# Altium PCB pcbCambiennhietdotestboard.PcbDoc
Units mm, origin at the board's own origin, x right, y up, seen from the top; angles counter-clockwise.
Board outline 3.61 x 3.61 mm, 2 copper layers (Top Layer, Bottom Layer); 49 components, 49 nets, 178 pads, 33 vias.
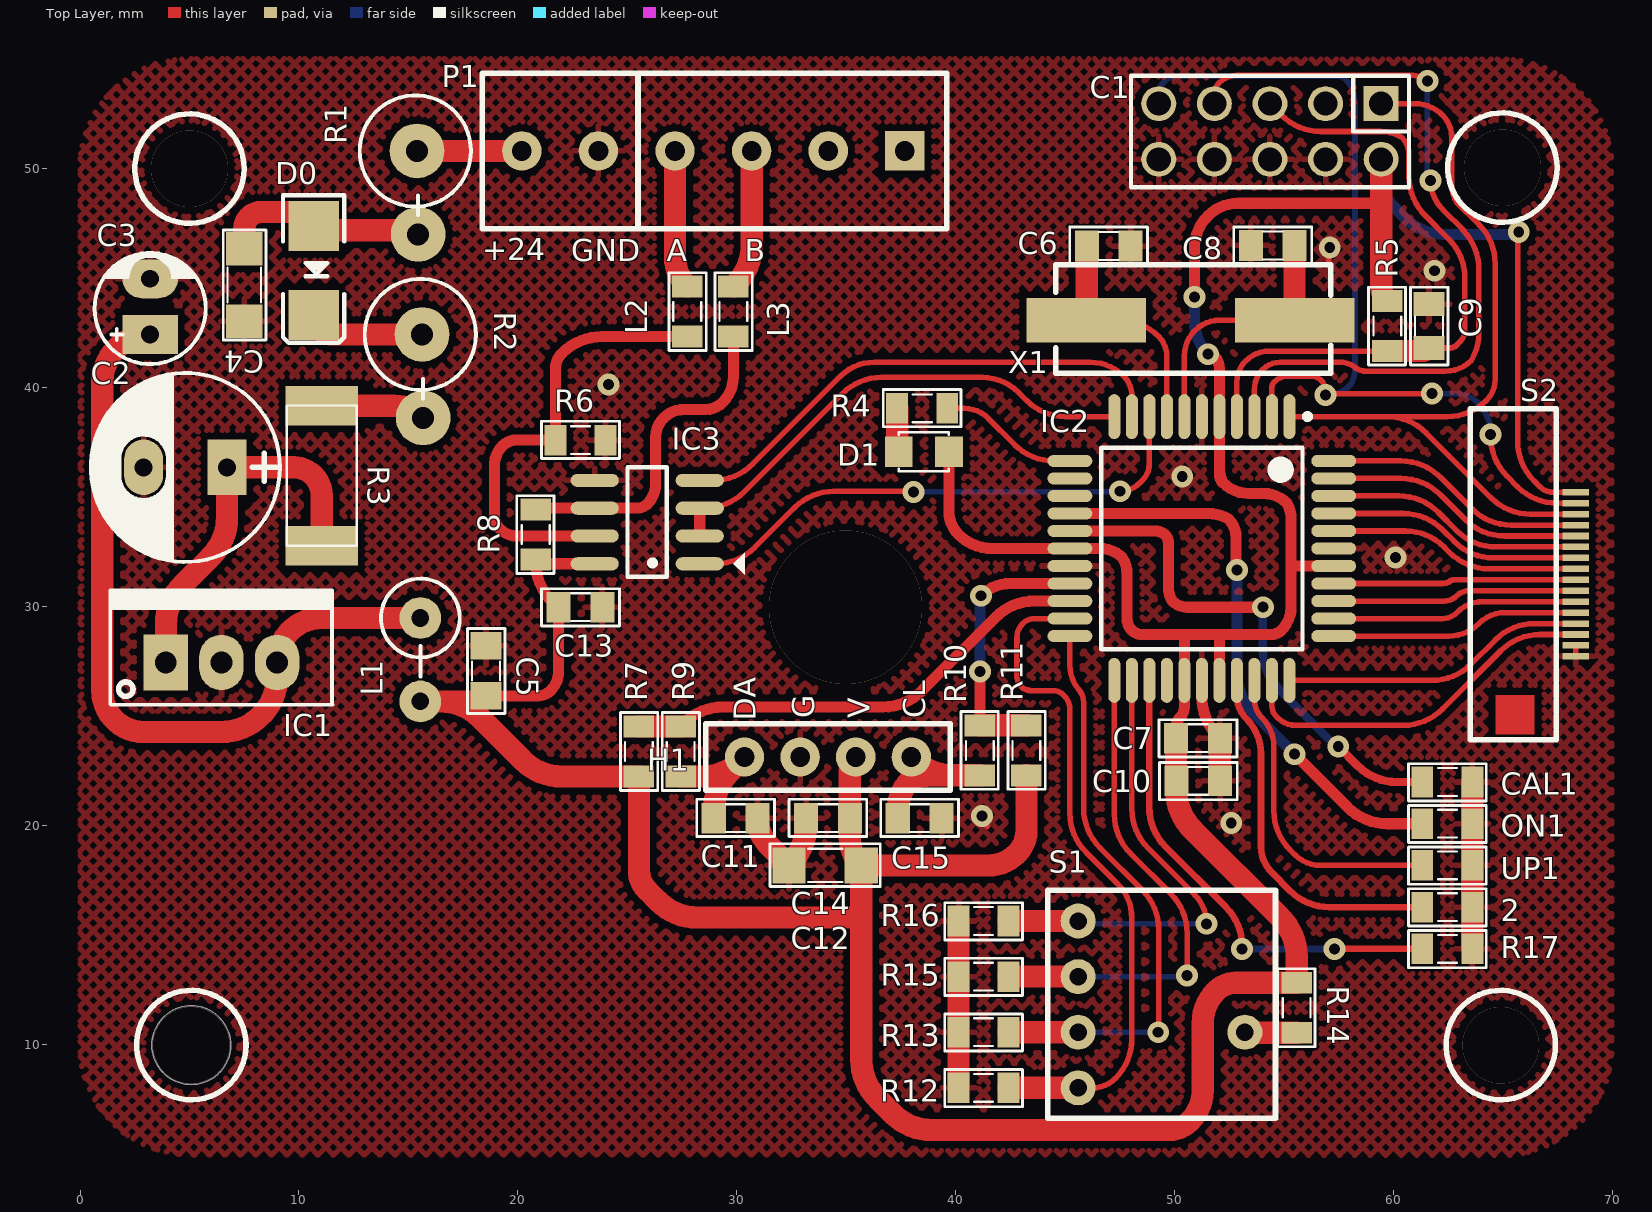
[diagram p0: Top Layer view]
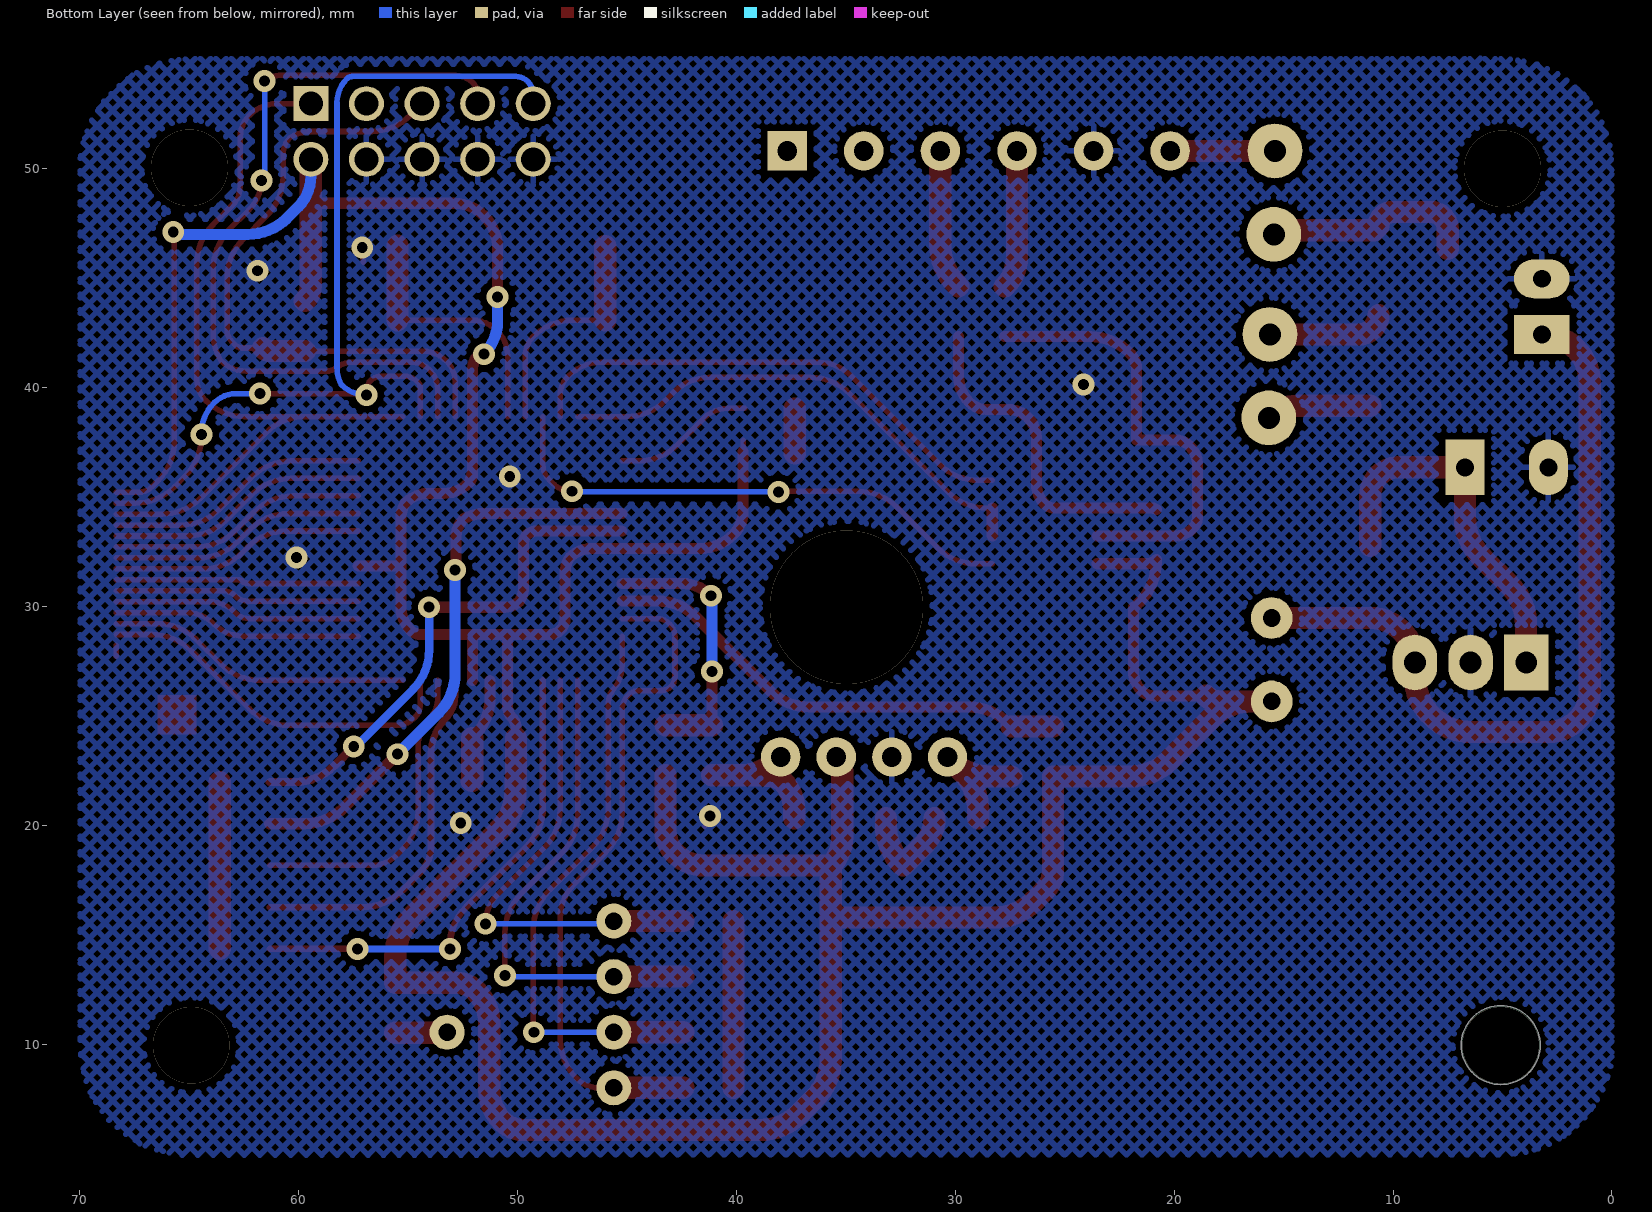
[diagram p1: Bottom Layer view, seen from below]

## Layer stack, top to bottom
Top Solder: solder mask 0.0102, Solder Resist, Dk 3.5
Top Layer: signal copper 0.0356
Dielectric 1: dielectric 0.32, FR-4, Dk 4.8
Bottom Layer: signal copper 0.0356
Bottom Solder: solder mask 0.0102, Solder Resist, Dk 3.5

## Board outline
3.277,9.953 ccw(c5.08,9.953) 5.08,8.15 ccw(c5.08,9.953) 6.883,9.953 ccw(c5.08,9.953) 5.08,11.756 ccw(c5.08,9.953)

## Design rules (kind name [scope] priority, off if disabled: settings)
Clearance [All] p1: gap=0.254 ignorepadtopadclearanceinfootprint=FALSE
PolygonConnect [All] p1: connectstyle=Relief reliefconductorwidth=0.254 reliefentries=4 polygonreliefangle="90 Angle" airgapwidth=0.254
RoutingVias [All] p1: holewidth=0.5 width=1 viastyle="Through Hole" minholewidth=0.5 minwidth=1 maxholewidth=0.5 maxwidth=1
SolderMaskExpansion [All] p1: expansion=0.102
Width [All] p1: maxlimit=1.016 minlimit=0.254 preferedwidth=0.508 minimp=50.000000 maximp=50.000000 favimp=50.000000
30 further rules are at their usual default settings.

## Components (designator, comment, footprint, x,y, rotation, side; value= is the part's Value field where it differs from the comment)
2 "0R" RES-SMD-0805 62.459,16.256 r0 top
C1 "JP5x2" JP5-D2T 54.356,51.689 r180 top
C2 "220uF/35V" CP1.5/3.4 6.713,36.346 r180 top value=100uF/35V/50V
C3 "100uF/16V" CP1/2 3.199,42.418 r90 top value=10uF/50V
C4 "10uF" SM-Cap-1206 7.5,46.33 r270 top
C5 "10uF" SM-CAP-0805 18.542,25.908 r90 top
C6 "33pF" CN-SMD-0805 46.99,46.457 r180 top
C7 "0.1uF" CN-SMD-0805 51.067,23.977 r0 top
C8 "33pF" CN-SMD-0805 54.483,46.482 r0 top
C9 "10uF" CN-SMD-0805 61.62,42.799 r90 top
C10 "10uF" CN-SMD-0805 51.083,22.022 r0 top
C11 "10uF" CN-SMD-0805 29.947,20.32 r180 top
C12 "10uF" SM-Cap-1206 32.385,18.161 r0 top value=103
C13 "10uF" CN-SMD-0805 22.86,29.957 r0 top
C14 "0.1uF" CN-SMD-0805 34.163,20.32 r180 top
C15 "10uF" CN-SMD-0805 38.354,20.32 r180 top
CAL1 "0R" RES-SMD-0805 62.459,21.971 r0 top
D0 "1N4007" DIO-SMD-106 10.668,45.339 r90 top value=1N5007 (schematic designator D0.0)
D1 "LED2" LED-0805-Red 37.401,37.059 r0 top
H1 "Header4P" PCBComponent_1 30.353,23.114 r0 top
IC1 "LM2940" QTO-220 3.919,27.432 r0 top
IC2 "ATMEL 16A" "TQFP 44" 51.244,32.639 r270 top value="Atmega 16L"
IC3 "MAX485" SO-8 25.908,33.846 r180 top
L1 "10uH" RES-1WD 15.545,27.813 r270 top
L2 "220nH" RES-SMD-0805 27.737,43.459 r90 top
L3 "220nH" RES-SMD-0805 29.845,43.459 r90 top
ON1 "0R" RES-SMD-0805 62.459,20.066 r0 top
P1 "CON6" 4plus2PKF350 22.438,47.498 r0 top
R1 "2R/1W" R2WD 15.443,45.72 r90 top value="R2W - 47"
R2 "160R/1W" R2WD 15.672,37.338 r90 top value="R2W - 47"
R3 "180R" RES-SMD-2512 11.168,35.965 r90 top
R4 "20k" RES-SMD-0805 38.47,39.04 r180 top
R5 "10k" RES-SMD-0805 59.715,42.799 r270 top
R6 "5k6" RES-SMD-0805 22.86,37.592 r180 top
R7 "24k" RES-SMD-0805 25.527,23.368 r90 top
R8 "5k6" RES-SMD-0805 20.816,33.274 r270 top
R9 "120R" RES-SMD-0805 27.432,23.368 r90 top
R10 "120R" RES-SMD-0805 41.107,23.419 r270 top
R11 "24k" RES-SMD-0805 43.231,23.419 r90 top
R12 "100k" RES-SMD-0805 41.275,8.001 r0 top
R13 "100k" RES-SMD-0805 41.275,10.541 r0 top
R14 "10k" RES-SMD-0805 55.575,11.659 r270 top
R15 "100k" RES-SMD-0805 41.275,13.081 r0 top
R16 "100k" RES-SMD-0805 41.275,15.621 r0 top
R17 "MD" RES-SMD-0805 62.459,14.351 r0 top
S1 "S-1010A" A-1010S 45.593,8.001 r0 top
S2 "SocketFPC" FPC16P-0.5 69.85,26.186 r90 top
UP1 "0R" RES-SMD-0805 62.459,18.161 r0 top
X1 "12Mhz" XTAL49S-SMD 55.483,43.067 r180 top value=4Mhz

## Footprints (in the part's own frame and the unit in brackets; to place one, negate y for a bottom-side part, rotate by r counter-clockwise, add the part's x,y. Pads: shape width x height; smd on the part's side, far side on the other; paste and mask are expansions set on the pad)
4plus2PKF350 [mm]
  rect 1.8x1.8 hole 0.9: 1(15.24,3.302)
  round 1.8 hole 0.9: 2(11.74,3.302) 3(8.24,3.302) 4(4.74,3.302) 5(1.24,3.302) 6(-2.26,3.302)
  silkscreen extent -4.06,-0.25 17.14,6.86, body extent -3.97,-0.17 17.03,6.73, height 8.81
A-1010S [mm]
  round 1.6 hole 0.8: 1(0,0) 2(0,2.54) 4(0,5.08) 8(0,7.62) C(7.62,2.54)
  silkscreen extent -1.4,-1.4 9.02,9.02, body extent -1.29,-1.27 8.91,8.93, height 6.81
CN-SMD-0805 [mm]
  rect 1.1x1.397 smd: 1(-1,0) 2(1,0)
  silkscreen extent -1.78,-0.86 1.78,0.84, body extent -1,-0.62 1,0.63, height 0.8
CP1.5/3.4 [mil] "Tu hoa 220->470uF,16V, 470uF/16V,25V"
  rect 70x100 hole 32: 1(0,0)
  oval 70x100 hole 32: 2(150,0)
  silkscreen extent -95,-170 245,170, body extent -85,-157 230,157, height 446
CP1/2 [mil] "Tu hoa < 22uF/16>50V"
  rect 70x100 hole 32: 1(0,0)
  oval 70x100 hole 32: 2(100,0)
  silkscreen extent -53,-100 146,100, body extent -49,-99 149,99, height 287
DIO-SMD-106 [mil]
  rect 90x90.55 smd: 1(80,0) 2(-80,0)
  silkscreen extent -130,-55 135,55, body extent -99,-50 106,52, height 95
FPC16P-0.5 [mm]
  rect 0.3x1.2 smd: 1(1.524,1.524) 2(2.024,1.524) 3(2.524,1.524) 4(3.024,1.524) 5(3.524,1.524) 6(4.024,1.524) 7(4.524,1.524) 8(5.024,1.524) 9(5.524,1.524) 10(6.024,1.524) 11(6.524,1.524) 12(7.024,1.524) 13(7.524,1.524) 14(8.024,1.524) 15(8.524,1.524) 16(9.024,1.524)
  silkscreen extent -2.29,2.41 12.83,6.35
JP5-D2T [mm] "10 pins, dual pin, straight, gold plating"
  rect 1.6x1.6 hole 1.1: 1(-5.08,-1.27)
  round 1.6 hole 1.1: 2(-2.54,-1.27) 3(0,-1.27) 4(2.54,-1.27) 5(5.08,-1.27) 6(5.08,1.27) 7(2.54,1.27) 8(0,1.27) 9(-2.54,1.27) 10(-5.08,1.27)
  silkscreen extent -6.35,-2.54 6.35,2.54, body extent -6.35,-2.54 6.35,2.54, height 8.55
LED-0805-Red [mil]
  rect 50x55 smd: 1(0,0) 2(90,0)
  silkscreen extent 0,-35 90,35, body extent 5,-25 85,25, height 43
PCBComponent_1 [mm]
  round 1.8 hole 0.9: 1(0,0) 2(2.54,0) 3(5.08,0) 4(7.62,0)
  silkscreen extent -1.78,-1.52 9.4,1.52
QTO-220 [mil] "TO-220 - 1-2-3"
  rect 80x100 hole 39: 1(0,0)
  oval 80x100 hole 39: 2(100,0) 3(200,0)
  silkscreen extent -100,-76 300,130, body extent -119,-64 322,121, height 755
R2WD [mm] "R2W, 2 pin, 700mil"
  round 2.5 hole 1: 1(1.27,0) 2(5.08,0.051)
  silkscreen extent 2.16,-2.41 7.62,2.67
RES-1WD [mm]
  round 1.905 hole 0.8: 1(-1.651,0) 2(2.159,0)
  silkscreen extent -3.45,-1.8 1.02,1.8, body extent -3.43,-1.7 2.67,1.7, height 12.65
RES-SMD-0805 [mil]
  rect 39.37x55 smd: 1(-45,0) 2(45,0)
  silkscreen extent -70,-34 70,33, body extent -39,-25 39,25, height 31
RES-SMD-2512 [mm] "Chip Capacitor, Body 3.2x2.5mm, IPC Medium Density"
  rect 1.8x3.3 smd: 1(-3.2,0.127) 2(3.2,0.127)
  silkscreen extent -3.2,-1.47 3.2,1.73, body extent -3.2,-1.47 3.2,1.73, height 0.6
SM-CAP-0805 [mil]
  rect 50x55 smd: 1(0,0) 2(90,0)
  silkscreen extent -32,-34 121,33, body extent 6,-25 84,25, height 31
SM-Cap-1206 [mil]
  rect 60x65 smd: 1(0,0) 2(130,0)
  silkscreen extent -34,-38 164,39, body extent 1,-31 127,32, height 40
SO-8 [mm] "8-Pin Small Outline Integrated Circuit 1.27 mm Pitch, IPC Medium Density"
  oval 2.2x0.6 smd: 1(-2.4,1.905) 2(-2.4,0.635) 3(-2.4,-0.635) 4(-2.4,-1.905) 5(2.4,-1.905) 6(2.4,-0.635) 7(2.4,0.635) 8(2.4,1.905)
  silkscreen extent -4.44,-2.5 0.9,2.5, body extent -2.89,-2.43 3.15,2.59, height 1.6
"TQFP 44" [mm] "TQFP, 44-Leads, Body 10,00x10,00mm, Pitch 0,80mm, IPC Medium Density"
  oval 2.05x0.55 smd: 1(-6.025,4) 2(-6.025,3.2) 3(-6.025,2.4) 4(-6.025,1.6) 5(-6.025,0.8) 6(-6.025,0) 7(-6.025,-0.8) 8(-6.025,-1.6) 9(-6.025,-2.4) 10(-6.025,-3.2) 11(-6.025,-4) 23(6.025,-4) 24(6.025,-3.2) 25(6.025,-2.4) 26(6.025,-1.6) 27(6.025,-0.8) 28(6.025,0) 29(6.025,0.8) 30(6.025,1.6) 31(6.025,2.4) 32(6.025,3.2) 33(6.025,4)
  oval 0.55x2.05 smd: 12(-4,-6.025) 13(-3.2,-6.025) 14(-2.4,-6.025) 15(-1.6,-6.025) 16(-0.8,-6.025) 17(0,-6.025) 18(0.8,-6.025) 19(1.6,-6.025) 20(2.4,-6.025) 21(3.2,-6.025) 22(4,-6.025) 34(4,6.025) 35(3.2,6.025) 36(2.4,6.025) 37(1.6,6.025) 38(0.8,6.025) 39(0,6.025) 40(-0.8,6.025) 41(-1.6,6.025) 42(-2.4,6.025) 43(-3.2,6.025) 44(-4,6.025)
  silkscreen extent -6.15,-4.6 4.6,4.95, body extent -6,-6 6,6, height 1.2
XTAL49S-SMD [mil]
  rect 215x80 smd: 1(0,0) 2(375,0)
  silkscreen extent -65,-100 430,95, body extent -61,-95 431,94, height 158

## Part data
2 CAL1 ON1 R3 R4 R5 R6 R7 R8 R9 R10 R11 R12 R13 R14 R15 R16 R17 UP1: library part Res-SMD, "Resistor", Manufacturer="Generic Components", Class=Passive, Published=08/06/2000, Publisher="Altium Hobart Technology Centre"
C1: "WR-PHD 2.54 mm Dual Socket Header", Manufacturer="Würth Elektronik eiSos GmbH", partNo=61301021821, ComponentLink1 Description=Manufacturer, ComponentLink1URL=http://www.we-online.com, ComponentLink2 Description=Datasheet, ComponentLink2URL=http://katalog.we-online.de/em/datasheet/6130xx21821.pdf, Created by="Karrer Zheng", Created Date="29 March 2013", NoPins=10
C2: library part CP3, "Cap 100uF/35V - 470uF/16V", Description 1="1000uF/6,3V - 470uF/16V - 330uF - 25V", Description 2="220uF/35V - 100uF/50V - 63V - 4,7uF/200V", Description 3="22uF => 33uF100V - 3,3uF => 4,7uF/250V", Description 4="2,2uF =>3,3uF/350 - 2,2uF/400V - 1uF/450V"
C3: library part CP1, "Cap P  0,1uF < 22uF , 16 - 50V", Description 1="10 => 220uF/6,3V/10V - 10uF => 100uF/16V", Description 2="0,1uF => 33uF/50V - 10uF => 22uF/63V", Description 3="0,47uF => 10uF/100V"
C4 C6 C7 C8 C9 C10 C11 C13 C14 C15: library part 1206C-10U-35V-X7R, "GENERIC CAPACITOR NON POLARISED 1206", Manufacturer="Taiyo Yuden", Manufacturer Part Number=GMK316F106ZL-T, Supplier Part Number 1=587-1352-2-ND, Reel=C90, Supplier 1=Digi-Key
C5: library part 0805C-10UF-25V-X5R-SAM, "CAPACITOR 0805 CERAMIC", Manufacturer 1=Samsung, Manufacturer Part Number 1=CL21A106KACLRNC, Reel=C19, Supplier Part Number 1=CL21A106KACLRNC, Supplierr 1=Samsung
C12: library part CM, "Cap SMD"
D0: library part "Diode SMD", "Default Diode", Code - JEDEC=DO-214-AB, Published=8-Jun-2000, Publisher="Altium Limited", Revision="July-2002: Re-released for DXP Platform."
D1: "Typical RED, GREEN, YELLOW, AMBER GaAs LED", LatestRevisionDate=17-Jul-2002, LatestRevisionNote="Re-released for DXP Platform.", PackageDescription="SM LED; 2 Flat Leads", PackageReference=3.2X1.6X1.1, PackageVersion=Feb-2002, Published=8-Jun-2000, Publisher="Altium Limited"
H1: library part HEADER4_PIN
IC1: library part TL-780
IC2: library part ATmega16A-AU, "8-bit AVR Microcontroller, 16KB Flash, 512 Bytes EEPROM, 1KB SRAM, 44-pin TQFP, Industrial Grade (-40癈 to 85癈)"
IC3: "RS232 - RS485 (Same sn75176)"
L1 L2 L3: library part L
P1: "Connector"
R1 R2: library part R2W, "Resistor 2W"
S1: "Switch", Manufacturer_Name="Copal Electronics", RS Part Number=3524666, Allied_Number=70041193, Allied Price/Stock=https://www.alliedelec.com/copal-s-1010a/70041193/, Datasheet Link=http://www.nidec-copal-electronics.com/e/catalog/switch/s-1000a&s-2000a.pdf, Manufacturer_Part_Number=S-1010A, RS Price/Stock=https://uk.rs-online.com/web/p/products/3524666
S2: library part FPC16P, "Socket FPC 16P 0.5mm"
X1: library part XT2, "Crystal, 32.768 KHz, -40 to 85 degC, 3.2 x 1.5 x 0.9 mm SMD"

## Via types
v1: diameter 1, hole 0.5, Top Layer to Bottom Layer, 28 vias
v2: diameter 3.5, hole 3.5, Top Layer to Bottom Layer, 4 vias
v3: diameter 7, hole 7, Top Layer to Bottom Layer, 1 vias

## Nets (pads, with @x,y where several pads share a name; then routed paths per layer and width w, separated by ;. In a path a pad name is that pad's centre, name@x,y a point inside that pad or via, vN(x,y) a via of type N, cw(c..) or ccw(c..) an arc to the next point about the centre after c; other vN are vias at no path point)
+24: P1.6 R1.2 | length 4.8
  Top Layer w1.016: R1.2 P1.6
GND: 2.2 C1.6 C1.7 C1.8 C1.9 C2.2 C3.2 C4.2 C5.2 C6.1 C7.2 C8.1 C9.2 C10.2 C11.1 C12.1 C13.2 C14.2 C15.1 CAL1.2 H1.2 IC1.2 IC2.6 IC2.18 IC2.28 IC2.39 IC3.5 ON1.2 P1.5 R6.1 R12.1 R13.1 R15.1 R16.1 R17.2 S2.1 S2.2 UP1.2 | length 27.4
  Top Layer w0.254: v1(24.146,40.134) v1@24.295,40.283 ; v1(41.205,20.424) 41.44,19.952 ; v1(52.589,20.095) v1@52.656,19.854 ; 57.049,45.712 v1(57.087,46.381) ; v1@60.003,32.151 v1(60.087,32.235) ; S2.1 S2.2
  Top Layer w0.508: IC2.28 51.244,25.852 ccw(c53.785,25.852) 51.988,24.056 C7.2
  Top Layer w1.016: C11.1 ccw(c32.685,20.32) 31.456,19.09 C12.1 32.419,18.195 ccw(c30.623,19.991) 33.163,19.991 C14.2 ; R12.1 R16.1 ; C7.2 52.067,22.06 ccw(c52.121,22.06) C10.2 ; R17.2 2.2 UP1.2 ON1.2 CAL1.2
  other v1: 50.35,35.933 61.867,45.328
NetC2_1: C2.1 IC1.1 R3.1 | length 17.2
  Top Layer w1.016: IC1.1 3.919,29.155 cw(c6.459,29.155) 4.663,30.952 5.969,32.258 ccw(c4.173,34.054) 6.713,34.054 C2.1 9.748,36.346 cw(c9.748,35.045) 10.661,35.971 ; 10.662,35.971 cw(c9.767,35.064) 11.041,35.064 R3.1
NetC3_1: C3.1 IC1.3 L1.1 | length 36.4
  Top Layer w1.016: C3.1 ccw(c3.199,40.235) 1.016,40.235 1.016,26.144 ccw(c2.903,26.144) 2.903,24.257 6.459,24.257 ccw(c6.459,26.797) 7.142,24.351 ccw(c6.459,26.797) 8.999,26.797 IC1.3 cw(c11.031,27.432) 9.017,27.705 cw(c11.031,27.432) 11.031,29.464 L1.1
NetC4_1: C4.1 D0.1 R1.1 | length 9.8
  Top Layer w1.016: C4.1 7.5,47.251 cw(c8.255,47.251) 8.255,48.006 10.033,48.006 cw(c10.033,47.371) D0.1 10.858,47.18 15.253,47.18 R1.1
NetC6_2: C6.2 IC2.8 X1.2 | length 10.7
  Top Layer w0.254: X1.2 45.984,43.067 47.473,43.067 cw(c47.473,40.527) 49.269,42.323 49.276,42.316 cw(c48.386,41.427) 49.644,41.427 IC2.8
  Top Layer w1.016: X1.2@45.984,43.067 ccw(c45.502,43.144) 45.99,43.144 C6.2
NetC8_2: C8.2 IC2.7 X1.1 | length 12.2
  Top Layer w0.254: IC2.7 50.444,41.431 cw(c52.092,41.431) 50.927,42.596 cw(c52.065,41.458) 52.065,43.067 X1.1
  Top Layer w1.016: X1.1 C8.2
NetD0_2: D0.2 R2.2 | length 5.5
  Top Layer w1.016: D0.2 ccw(c11.557,43.307) 11.557,42.418 R2.2
NetD1_1: D1.1 R4.2 | length 2.1
  Top Layer w1.016: D1.1@37.327,36.982 R4.2
NetIC2_12: IC2.12 R4.1 | length 6.4
  Top Layer w0.254: R4.1 40.392,39.04 cw(c40.392,37.491) 41.487,38.586 42.69,37.383 ccw(c44.486,39.179) 44.486,36.639 IC2.12
NetIC3_6: IC3.6 L3.1 R8.1 | length 15.3
  Top Layer w0.508: R8.1 cw(c20.969,34.264) 20.969,34.48 IC3.6 25.448,34.48 ccw(c25.448,35.131) 25.908,34.671 ccw(c24.988,35.591) 26.289,35.591 26.289,37.719 cw(c27.515,37.719) 26.648,38.586 26.67,38.608 cw(c27.59,37.688) 27.59,38.989 28.575,38.989 ccw(c28.575,40.088) 29.352,39.311 ccw(c28.161,40.501) 29.845,40.501 L3.1
NetIC3_7: IC3.7 L2.1 R6.2 | length 20.9
  Top Layer w0.508: 21.986,41.528 ccw(c22.638,40.878) 21.717,40.878 R6.2 19.917,37.592 ccw(c19.917,36.725) 19.304,37.338 ccw(c20.224,36.418) 18.923,36.418 18.923,34.141 ccw(c19.79,34.141) 19.177,33.528 ccw(c19.944,34.295) 19.944,33.21 IC3.7 ; 21.987,41.529 22.03,41.572 cw(c23.826,39.776) 23.826,42.316 L2.1
NetR2_1: R2.1 R3.2 | length 4.8
  Top Layer w1.016: R3.2 14.328,39.165 cw(c14.328,37.264) R2.1
NetR14_2: R14.2 S1.C | length 2.4
  Top Layer w1.016: S1.C ccw(c53.274,10.602) 53.274,10.516 R14.2
PIN_1: C1.1 IC2.1 S2.14 | length 36.3
  Top Layer w0.254: IC2.1 59.695,38.664 ; C1.1 60.973,52.959 cw(c60.973,51.163) 62.243,52.433 cw(c61.232,51.422) 62.662,51.422 62.662,49.2 ccw(c63.988,49.2) 62.89,48.456 63.899,47.447 cw(c62.103,45.651) 64.236,47.031 cw(c62.103,45.651) 64.643,45.651 64.643,40.359 cw(c63.298,40.359) 64.249,39.408 cw(c62.453,41.204) 62.453,38.664 59.695,38.664 ; S2.14 66.253,34.21 cw(c66.253,36.75) 64.457,34.954 61.491,37.92 ccw(c59.695,36.124) 59.695,38.664
PIN_2: C1.5 IC2.2 S2.15 | length 43.9
  Top Layer w0.254: IC2.2 54.444,39.982 cw(c54.836,39.982) 54.559,40.259 cw(c55.172,39.646) 55.172,40.513 56.185,40.513 cw(c56.185,39.746) 56.727,40.288 56.757,40.259 cw(c55.769,39.716) 56.896,39.716 v1(56.896,39.649) ccw(c56.96,39.713) v1@56.96,39.623 ; v1@56.96,39.476 57.197,39.713 v1(61.751,39.713) ; v1(64.44,37.846) 64.44,37.739 ccw(c66.98,37.739) 65.184,35.943 65.672,35.454 ccw(c67.469,37.25) 67.469,34.71 S2.15
  Bottom Layer w0.254: C1.5 49.276,53.362 cw(c50.143,53.362) 49.53,53.975 cw(c50.082,53.423) 50.082,54.204 57.54,54.204 cw(c57.54,53.857) 57.786,54.101 ; v1(56.896,39.649) 56.908,39.649 ccw(c56.908,41.252) 58.042,40.119 ccw(c56.581,40.91) 58.223,40.659 ccw(c56.581,40.91) 58.242,40.91 58.242,52.998 ccw(c56.681,52.998) 57.786,54.101 ; v1(61.751,39.713) 62.843,39.713 cw(c62.843,38.281) 63.856,39.294 cw(c62.445,37.883) 64.372,38.399 cw(c62.445,37.883) 64.44,37.883 v1(64.44,37.846)
PIN_3: C1.4 IC2.3 | length 36.8
  Top Layer w0.254: C1.4 51.816,53.372 cw(c52.596,53.372) 52.045,53.924 cw(c52.842,53.127) 52.842,54.254 60.891,54.254 cw(c60.891,53.474) 61.443,54.026 ccw(c61.504,54.087) 61.504,54 v1(61.544,54) ; IC2.3 53.645,39.892 cw(c54.965,39.892) 53.95,40.736 54.031,40.818 cw(c54.829,40.02) 54.829,41.148 57.564,41.148 cw(c57.564,40.02) 58.127,40.997 ; v1(61.697,49.454) ccw(c63.562,49.454) 62.243,48.135 63.238,47.139 ccw(c63.17,47.071) 63.17,47.168 cw(c61.409,45.407) 63.899,45.407 63.899,42.497 cw(c61.409,42.497) 63.551,41.228 cw(c62.364,42.415) 62.364,40.736 58.758,40.736 cw(c58.758,41.628) 58.337,40.842 ; 58.127,40.997 cw(c57.564,40.02) 58.337,40.842 ; 58.128,40.997 ccw(c58.758,41.628) 58.337,40.842
  Bottom Layer w0.254: v1(61.544,54) 61.544,49.822 ccw(c62.065,49.822) v1(61.697,49.454)
PIN_4: C1.3 C9.1 IC2.4 R5.2 | length 29.5
  Top Layer w0.254: IC2.4 52.844,40.248 cw(c54.189,40.248) 53.238,41.199 cw(c54.342,40.095) 54.342,41.656 R5.2 ; C1.3 54.882,52.433 ccw(c56.678,54.229) 56.678,51.689 59.418,51.689 cw(c59.418,49.868) 60.39,51.408 cw(c59.627,50.645) 60.706,50.645 60.706,49.642 ccw(c63.246,49.642) 61.026,48.409 ccw(c63.246,49.642) 61.45,47.846 62.52,46.776 cw(c60.724,44.98) 63.264,44.98 63.264,42.616 cw(c62.523,42.616) 63.047,42.092 62.89,41.935 cw(c62.561,42.264) 62.561,41.799 C9.1
  Top Layer w1.016: R5.2 61.275,41.656 ccw(c61.275,42.145) C9.1
PIN_5: C1.10 C5.1 C7.1 C10.1 C12.2 C13.1 C14.1 D1.2 H1.3 IC2.5 IC2.17 IC2.27 IC2.29 IC2.38 IC3.8 L1.2 R5.1 R7.1 R8.2 R11.1 R14.1 S2.16 | length 197.9
  Top Layer w0.254: D1.2 D1.2@39.688,37.592 ; v1(65.722,47.092) 65.557,47.092 65.507,47.041 cw(c65.106,46.64) 65.672,46.64 65.672,37.529 ccw(c68.212,37.529) 66.416,35.733 66.695,35.454 ccw(c67.284,36.043) 67.284,35.21 S2.16
  Top Layer w0.508: C5.1 20.925,25.908 ccw(c20.925,26.712) 21.494,26.144 ccw(c20.61,27.028) 21.86,27.028 C13.1 ; C13.1@21.775,29.992 21.56,30.208 cw(c23.356,32.004) 20.816,32.004 R8.2 ccw(c21.275,32.591) 21.275,31.941 IC3.8 ; D1.2 39.688,34.347 ccw(c41.205,34.347) 40.132,33.274 ccw(c41.665,34.807) 41.665,32.639 IC2.17 46.591,32.639 cw(c46.591,31.174) 47.627,32.21 cw(c46.353,31.466) 47.828,31.466 47.828,29.427 ccw(c48.566,29.427) 48.041,28.908 ccw(c48.403,29.265) 48.046,28.903 ccw(c48.516,29.376) 48.516,28.71 50.444,28.71 ; C7.1 50.067,24.461 cw(c50.749,24.461) 50.267,24.943 ccw(c49.837,25.372) 50.444,25.372 IC2.27 50.444,28.71 ; v1(50.902,44.12) 50.902,46.326 cw(c53.051,46.326) 51.531,47.846 cw(c52.889,46.489) 52.889,48.409 59.436,48.409 ; v1(51.531,41.515) 51.613,41.515 cw(c51.613,41.228) 51.816,41.431 cw(c51.264,40.879) 52.044,40.879 IC2.5 52.044,36.34 ; IC2.29 52.044,28.618 cw(c52.175,28.618) 52.083,28.71 ; IC2.38 55.321,31.839 ; 50.444,28.71 52.083,28.71 ; 52.044,36.34 ccw(c53.578,36.34) 52.215,35.636 ; 52.044,36.34 52.044,36.049 ccw(c52.628,36.049) 52.215,35.636 ; 52.083,28.71 54.411,28.71 ccw(c54.411,29.376) 54.882,28.905 ccw(c53.822,29.965) 55.321,29.965 55.321,31.839 ; 52.215,35.636 ccw(c53.377,36.797) 53.377,35.155 54.056,35.155 cw(c54.056,33.635) 55.131,34.71 cw(c53.822,33.979) 55.321,33.979 55.321,31.839
  Top Layer w1.016: L1.2 L1.2@16.474,25.654 ; C5.1 cw(c17.929,26.521) 17.929,25.654 L1.2@16.474,25.654 ; R11.1 43.231,19.747 cw(c41.757,19.747) 42.799,18.705 cw(c41.487,20.017) 41.487,18.161 C12.2 ; C7.1 50.067,22.06 ccw(c50.121,22.06) C10.1 50.083,21.581 ccw(c52.623,21.581) 50.827,19.785 54.831,15.781 cw(c53.035,13.985) 55.575,13.985 R14.1 52.808,12.802 ccw(c52.808,11.501) 51.888,12.421 ccw(c53.351,10.958) 51.283,10.973 ccw(c53.351,10.958) 51.283,10.958 51.283,7.887 cw(c49.288,7.887) 50.698,6.477 cw(c49.717,7.458) 49.717,6.071 38.913,6.071 cw(c38.913,8.586) 37.135,6.807 36.431,7.511 cw(c38.227,9.307) 35.687,9.307 35.687,15.781 ; C1.10 59.436,48.409 59.436,44.617 ccw(c60.39,44.617) R5.1 ; L1.2@16.474,25.654 cw(c16.474,23.114) 18.27,24.91 20.211,22.969 ccw(c22.007,24.765) 22.007,22.225 R7.1 25.527,17.945 ccw(c26.828,17.945) 25.908,17.026 26.409,16.525 ccw(c28.205,18.321) 28.205,15.781 35.687,15.781 ; H1.3@35.163,22.462 cw(c36.085,22.462) H1.3 ccw(c36.085,22.462) H1.3@35.163,22.462 ; H1.3@35.163,22.462 C14.1 35.163,19.426 ccw(c36.952,19.426) C12.2 ; 35.687,15.781 C12.2
  Bottom Layer w0.508: v1(50.902,44.12) 50.902,43.035 ccw(c53.051,43.035) v1(51.531,41.515) ; C1.10 59.436,49.645 ccw(c61.431,49.645) 60.02,48.235 60.521,47.734 ccw(c62.317,49.53) 62.317,46.99 65.384,46.99 ccw(c65.384,47.163) 65.507,47.041 65.557,47.092 v1(65.722,47.092)
PIN_9: IC2.9 IC3.1 | length 24.5
  Top Layer w0.254: IC3.1 29.022,31.941 ccw(c29.022,34.48) 30.818,32.684 32.642,34.509 cw(c34.438,32.713) 34.438,35.253 37.998,35.253 cw(c37.998,35.155) v1(38.067,35.224) ; v1(47.498,35.255) ccw(c47.498,36.556) 48.418,35.636 48.532,35.75 ccw(c47.778,36.505) 48.844,36.505 IC2.9
  Bottom Layer w0.254: v1(38.067,35.224) 47.221,35.224 ccw(c47.221,35.329) 47.295,35.255 v1(47.498,35.255)
PIN_10: IC2.10 IC3.4 | length 23.5
  Top Layer w0.254: IC3.4 28.927,35.75 ccw(c28.927,38.291) 30.723,36.494 34.742,40.513 cw(c36.275,38.98) 34.743,40.514 cw(c36.275,38.98) 36.275,41.148 46.143,41.148 cw(c46.143,38.98) 47.676,40.513 cw(c46.786,39.623) 48.044,39.623 IC2.10
PIN_11: IC2.11 IC3.2 IC3.3 | length 23
  Top Layer w0.254: IC3.3 28.536,34.48 ccw(c28.536,37.02) 30.332,35.224 34.823,39.716 cw(c36.619,37.92) 36.619,40.46 41.205,40.46 cw(c41.205,38.108) 42.867,39.772 cw(c41.205,38.108) 42.868,39.771 43.231,39.408 ccw(c45.027,41.204) 45.027,38.664 IC2.11
  Top Layer w0.508: IC3.2 IC3.3
PIN_15: IC2.15 ON1.1 | length 26.3
  Top Layer w0.381: v1@52.844,31.601 v1(52.844,31.654) ; v1@55.483,23.191 v1(55.483,23.242)
  Top Layer w0.508: IC2.15 51.531,34.239 cw(c51.531,32.433) 52.465,33.979 cw(c51.636,33.15) 52.808,33.15 52.808,31.742 ccw(c52.932,31.742) v1(52.844,31.654) ; v1(55.483,23.242) 57.915,20.81 ; 57.915,20.81 ccw(c59.711,22.606) 59.711,20.066 ON1.1
  Bottom Layer w0.508: v1(52.844,31.654) 52.844,26.933 ccw(c55.384,26.933) 53.588,25.137 v1(55.483,23.242)
PIN_16: CAL1.1 IC2.16 | length 23.8
  Top Layer w0.381: v1(57.476,23.596) 57.48,23.596 58.362,22.715 ccw(c60.158,24.511) 60.158,21.971 CAL1.1
  Top Layer w0.508: IC2.16 49.092,33.439 cw(c49.092,32.657) 49.425,33.364 cw(c49.209,32.904) 49.717,32.903 49.717,30.87 ccw(c50.911,30.87) 49.898,30.239 ccw(c50.579,30.92) 50.579,29.957 v1(54.031,29.957)
  Bottom Layer w0.381: v1(54.031,29.957) 54.031,27.996 ccw(c56.571,27.996) 54.775,26.2 57.31,23.665 ccw(c57.476,23.832) v1(57.476,23.596)
PIN_19: IC2.19 R10.1 R11.2 | length 12.4
  Top Layer w0.508: R10.1 v1(41.107,27.028) ; v1(41.148,30.48) cw(c42.498,29.13) 42.498,31.039 IC2.19
  Top Layer w1.016: R10.1 R11.2
  Bottom Layer w0.508: v1(41.107,27.028) 41.107,30.272 ccw(c40.813,30.272) 41.021,30.48 v1(41.148,30.48)
PIN_20: IC2.20 R7.2 R9.2 | length 21.7
  Top Layer w0.508: R9.2 27.577,24.656 cw(c29.373,22.86) 29.373,25.4 36.674,25.4 ccw(c36.674,27.94) 38.47,26.144 41.821,29.495 cw(c43.617,27.699) 43.617,30.239 IC2.20
  Top Layer w1.016: R7.2 R9.2
PIN_21: IC2.21 R12.2 S1.1 | length 31
  Top Layer w0.254: IC2.21 43.617,29.439 ccw(c43.617,28.654) 43.062,29.209 ccw(c43.697,28.574) 42.799,28.574 42.799,26.776 ccw(c43.398,26.776) 42.975,26.352 43.062,26.264 ccw(c43.509,27.034) 43.509,26.144 44.45,26.144 cw(c44.45,25.486) 44.915,25.951 44.958,25.908 cw(c44.345,25.295) 45.212,25.295 45.212,20.559 ccw(c47.752,20.559) 45.956,18.763 47.396,17.323 cw(c45.832,15.758) 48.044,15.758 48.044,10.235 cw(c45.504,10.235) 47.301,8.439 47.295,8.433 cw(c46.252,9.475) 46.252,8.001 S1.1
  Top Layer w1.016: R12.2 S1.1
PIN_22: IC2.22 R13.2 S1.2 | length 26.4
  Top Layer w0.254: IC2.22 45.22,27.305 ccw(c46.973,27.305) 45.593,26.223 ; v1(49.251,10.541) ccw(c49.189,10.602) 49.276,10.602 49.276,15.229 ccw(c46.736,15.229) 48.532,17.025 46.591,18.966 cw(c48.387,20.763) 45.847,20.763 45.847,25.61 ccw(c44.98,25.61) 45.684,26.117 ; 45.593,26.223 ccw(c46.973,27.305) 45.684,26.117 ; 45.593,26.223 cw(c44.98,25.61) 45.684,26.117
  Top Layer w1.016: R13.2 S1.2
  Bottom Layer w0.254: S1.2 v1(49.251,10.541)
PIN_23: IC2.23 R15.2 S1.4 | length 22.8
  Top Layer w0.254: IC2.23 47.245,20.501 ccw(c49.785,20.501) 47.988,18.705 49.827,16.866 cw(c48.031,15.07) 50.571,15.07 v1(50.571,13.132)
  Top Layer w1.016: R15.2 S1.4
  Bottom Layer w0.254: S1.4 50.449,13.081 ccw(c50.449,13.254) v1(50.571,13.132)
PIN_24: IC2.24 R16.2 S1.8 | length 21.4
  Top Layer w0.254: IC2.24 48.044,20.749 ccw(c50.584,20.749) 48.788,18.953 50.267,17.475 50.904,16.838 cw(c49.559,15.494) v1(51.46,15.494)
  Top Layer w1.016: R16.2 S1.8
  Bottom Layer w0.254: S1.8 45.72,15.494 v1(51.46,15.494)
PIN_25: IC2.25 R17.1 | length 22
  Top Layer w0.305: IC2.25 48.844,20.808 ccw(c51.384,20.808) 49.588,19.012 52.342,16.258 cw(c50.546,14.462) 53.086,14.462 v1(53.086,14.343) ; v1(57.302,14.351) R17.1
  Bottom Layer w0.305: v1(53.086,14.343) 57.269,14.343 57.277,14.351 v1(57.302,14.351)
PIN_26: IC2.26
PIN_30: 2.1 IC2.30 | length 16.6
  Top Layer w0.305: IC2.30 52.844,25.916 ccw(c54.345,25.916) 53.284,24.855 cw(c51.677,23.248) 53.95,23.248 53.95,19.026 ccw(c55.639,19.026) 54.444,17.831 55.275,17 ccw(c57.071,18.796) 57.071,16.256 2.1
PIN_31: IC2.31 UP1.1 | length 14.4
  Top Layer w0.254: IC2.31 53.645,25.743 ccw(c54.838,25.743) 53.994,24.9 cw(c52.691,23.596) 54.534,23.596 54.534,20.661 ccw(c57.074,20.661) 55.278,18.865 55.477,18.665 ccw(c56.695,19.883) 56.695,18.161 UP1.1
PIN_32: IC2.32 S2.3 | length 17
  Top Layer w0.254: IC2.32 54.444,25.437 ccw(c55.096,25.437) 54.635,24.977 54.707,24.905 ccw(c55.536,25.734) 55.536,24.562 60.443,24.562 ccw(c60.443,27.102) 62.239,25.306 64.899,27.966 cw(c66.695,26.17) 66.695,28.71 S2.3
PIN_33: IC2.33 S2.4 | length 13.9
  Top Layer w0.254: IC2.33 61.751,26.614 ccw(c61.751,29.154) 63.547,27.358 64.655,28.466 cw(c66.451,26.67) 66.451,29.21 S2.4
PIN_34: IC2.34 S2.5 | length 11.3
  Top Layer w0.254: IC2.34 62.523,28.639 ccw(c62.523,30.585) 63.899,29.209 cw(c65.109,27.999) 65.109,29.71 S2.5
PIN_35: IC2.35 S2.6 | length 11.3
  Top Layer w0.254: IC2.35 62.236,29.439 ccw(c62.236,30.364) 62.89,29.71 cw(c64.098,28.503) 64.098,30.21 S2.6
PIN_36: IC2.36 S2.7 | length 11.2
  Top Layer w0.254: IC2.36 62.309,30.239 ccw(c62.309,31.062) 62.89,30.48 cw(c63.446,29.925) 63.446,30.71 S2.7
PIN_37: IC2.37 S2.8 | length 11.2
  Top Layer w0.254: IC2.37 62.249,31.039 ccw(c62.249,31.623) 62.63,31.181 ; 62.52,31.106 cw(c62.772,30.854) 62.63,31.181 ; S2.8 62.772,31.21 ccw(c62.772,30.854) 62.63,31.181
PIN_40: IC2.40 S2.9 | length 11.6
  Top Layer w0.254: IC2.40 60.549,33.439 cw(c60.549,30.95) 62.309,32.71 62.565,32.454 ccw(c64.361,34.25) 64.361,31.71 S2.9
PIN_41: IC2.41 S2.10 | length 11.7
  Top Layer w0.254: IC2.41 60.441,34.239 cw(c60.441,31.699) 62.238,33.495 62.779,32.954 ccw(c64.575,34.75) 64.575,32.21 S2.10
PIN_42: IC2.42 S2.11 | length 11.8
  Top Layer w0.254: IC2.42 60.249,35.039 cw(c60.249,32.499) 62.045,34.295 62.886,33.454 ccw(c64.682,35.25) 64.682,32.71 S2.11
PIN_43: IC2.43 S2.12 | length 11.9
  Top Layer w0.254: IC2.43 60.342,35.839 cw(c60.342,33.299) 62.138,35.095 63.279,33.954 ccw(c65.075,35.75) 65.075,33.21 S2.12
PIN_44: IC2.44 S2.13 | length 12.1
  Top Layer w0.254: IC2.44 60.343,36.639 cw(c60.343,34.099) 62.139,35.895 63.58,34.454 ccw(c65.376,36.25) 65.376,33.71 S2.13
RS485_A: L3.2 P1.3 | length 6.4
  Top Layer w1.016: L3.2 29.934,44.691 ccw(c28.138,46.487) 30.678,46.487 P1.3
RS485_B: L2.2 P1.4 | length 6.3
  Top Layer w1.016: P1.4 27.178,45.951 ccw(c29.086,45.951) L2.2
SCL: C15.2 H1.4 R10.2 | length 7.2
  Top Layer w1.016: C15.2 37.354,20.672 cw(c39.317,20.672) 37.929,22.06 cw(c38.864,20.14) 38.864,22.276 39.863,22.276 ; H1.4 38.067,23.02 ccw(c39.863,24.816) 39.863,22.276 ; R10.2 39.863,22.276
SDA: C11.2 H1.1 R9.1 | length 6.2
  Top Layer w1.016: R9.1 28.412,22.225 ccw(c28.412,24.765) H1.1@30.208,22.969 ; C11.2 28.946,20.655 cw(c31.486,20.655) 29.69,22.451 H1.1@30.208,22.969 ; H1.1 H1.1@30.208,22.969
pads on no net: C1.2 IC2.13 IC2.14 P1.1 P1.2
copper on no net:
  other v2: 5.08,9.953 64.897,9.953 5,49.991 64.977,50.038
  other v3: 34.971,29.957

## Polygon pours and split planes (outlines as drawn)
GND on Top Layer "Top Layer-GND" (hatched 45Degree grid 0.5 track 0.254, pour order 10): 5.055,55.016 4.343,54.966 3.556,54.813 2.997,54.61 2.286,54.204 1.626,53.696 1.067,53.111 0.66,52.502 0.305,51.765 0.102,51.003 0,50.47 0,9.271 0.203,8.509 0.508,7.747 0.787,7.239 1.067,6.833 1.499,6.375 1.93,5.969 2.337,5.74 2.718,5.512 3.302,5.232 3.919,5.08 4.674,4.953 65.405,4.928 66.116,5.055 66.929,5.334 67.564,5.664 68.021,5.994 68.682,6.553 69.291,7.391 69.647,8.077 69.901,8.992 69.977,9.779 69.977,13.513 69.952,50.597 69.799,51.333 69.571,51.994 69.266,52.578 68.91,53.086 68.301,53.721 67.92,54.026 67.158,54.508 66.548,54.737 65.862,54.915 65.227,54.991 63.322,54.991 10.668,55.016
GND on Top Layer "Top Layer-GND 2" (hatched Horizontal grid 0.508 track 0.203, pour order 4): 5.461,55.016
GND on Top Layer "Top Layer-GND 3" (hatched Horizontal grid 0.508 track 0.203, pour order 2): 5.055,55.016
GND on Top Layer "Top Layer-GND 1" (solid, pour order 0): -11.049,43.815
GND on Bottom Layer "Bottom Layer-GND" (hatched 45Degree grid 0.5 track 0.254, pour order 12): 6.502,55.042 4.724,54.991 3.607,54.839 2.692,54.458 2.057,54.026 1.295,53.391 0.787,52.73 0.33,51.867 0.076,51.003 0,50.19 0,9.347 0.102,8.763 0.432,7.849 0.787,7.239 1.372,6.477 1.93,5.969 2.515,5.613 3.15,5.283 3.962,5.055 4.775,4.953 6.655,4.953 65.456,4.928 66.446,5.156 67.259,5.461 67.92,5.893 68.656,6.528 69.139,7.137 69.545,7.849 69.748,8.433 69.926,9.296 69.977,10.465 69.977,50.495 69.799,51.283 69.545,52.045 68.961,52.998 68.25,53.721 67.539,54.305 66.675,54.712 65.888,54.915 65.024,55.016 6.502,55.016

## Other copper
Top Layer:
  rectangle: 64.651,24.151 66.451,25.951

## Silkscreen, mask and mechanical layers (free items; w line width, h text height)
Top Overlay:
  circle w0.254: c5.08,9.953 r2.5
  circle w0.254: c64.897,9.953 r2.5
  circle w0.254: c64.977,50.038 r2.5
  circle w0.254: c5,49.991 r2.5
  text "+24" at 18.374,45.796 h1
  text "GND" at 22.428,45.758 h1
  text "A" at 26.797,45.758 h1
  text "B" at 30.353,45.758 h1
Drill Drawing:
  circle w0.254: c5,49.991 r1.894
  circle w0.254: c5.08,9.953 r1.803
  circle w0.254: c64.897,9.953 r1.785
  circle w0.254: c64.977,49.991 r1.735
  circle w0.254: c64.897,9.953 r2.108
  circle w0.254: c5,49.991 r2.175
  circle w0.254: c5.08,9.953 r2.134
  lines w0.254: 0,9.953 ccw(c5,9.953) 5,4.953 ; 0,10.033 0,50.038 ; 0,49.991 cw(c5,49.991) 5,54.991 ; 4.953,4.953 65.151,4.953 ; 4.953,55 64.888,55 ; 64.977,4.953 ccw(c64.977,9.953) 69.977,9.953 ; 64.977,54.991 cw(c64.977,49.991) 69.977,49.991 ; 69.977,10.033 69.977,49.911

## Text inside footprints (layer, text, board x,y; h text height)
H1: Top Overlay "CL" at 38.608,24.892 h1 r90; Top Overlay "V" at 36.068,24.892 h1 r90; Top Overlay "G" at 33.528,24.892 h1 r90; Top Overlay "DA" at 30.861,24.765 h1 r90